# EAGLE board hacksaw_fp_r0 (EAGLE 7.3.0)
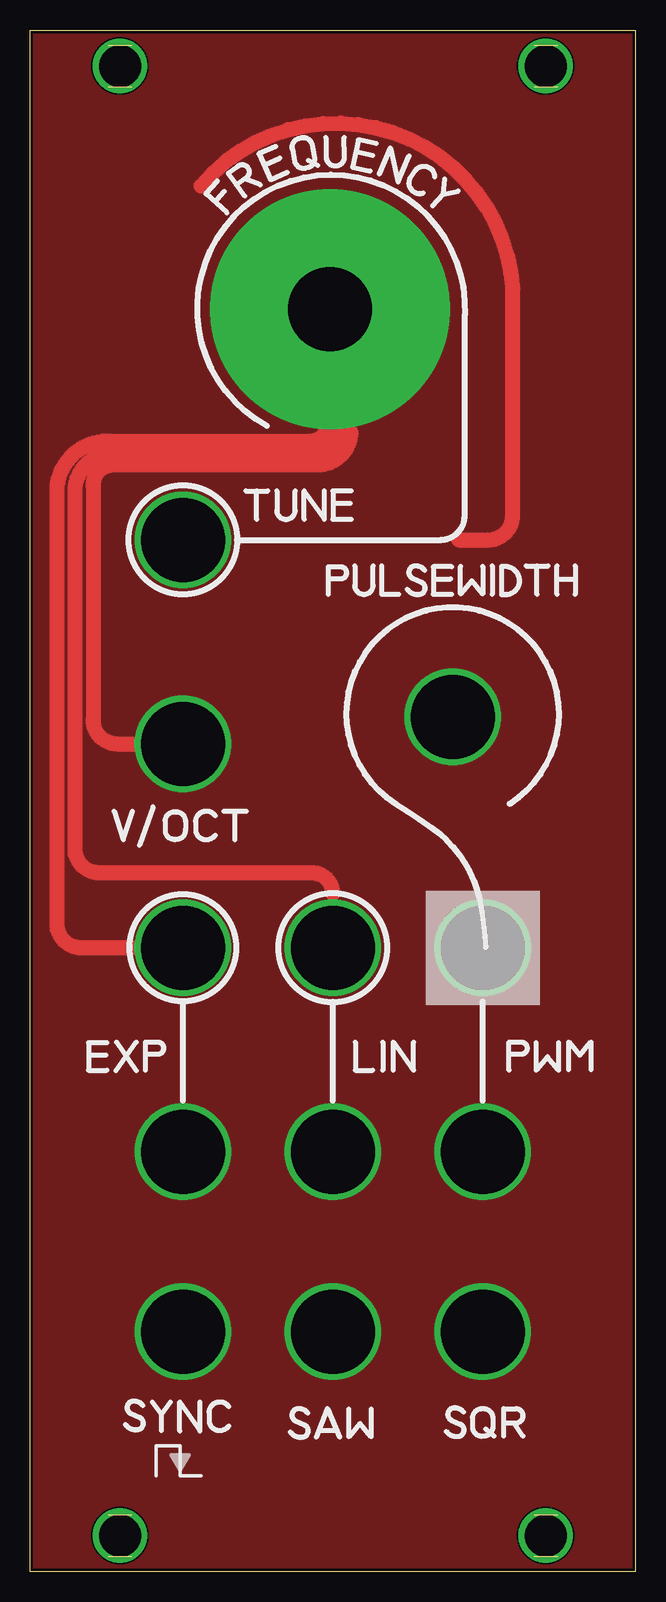
[diagram p0: board, top side]
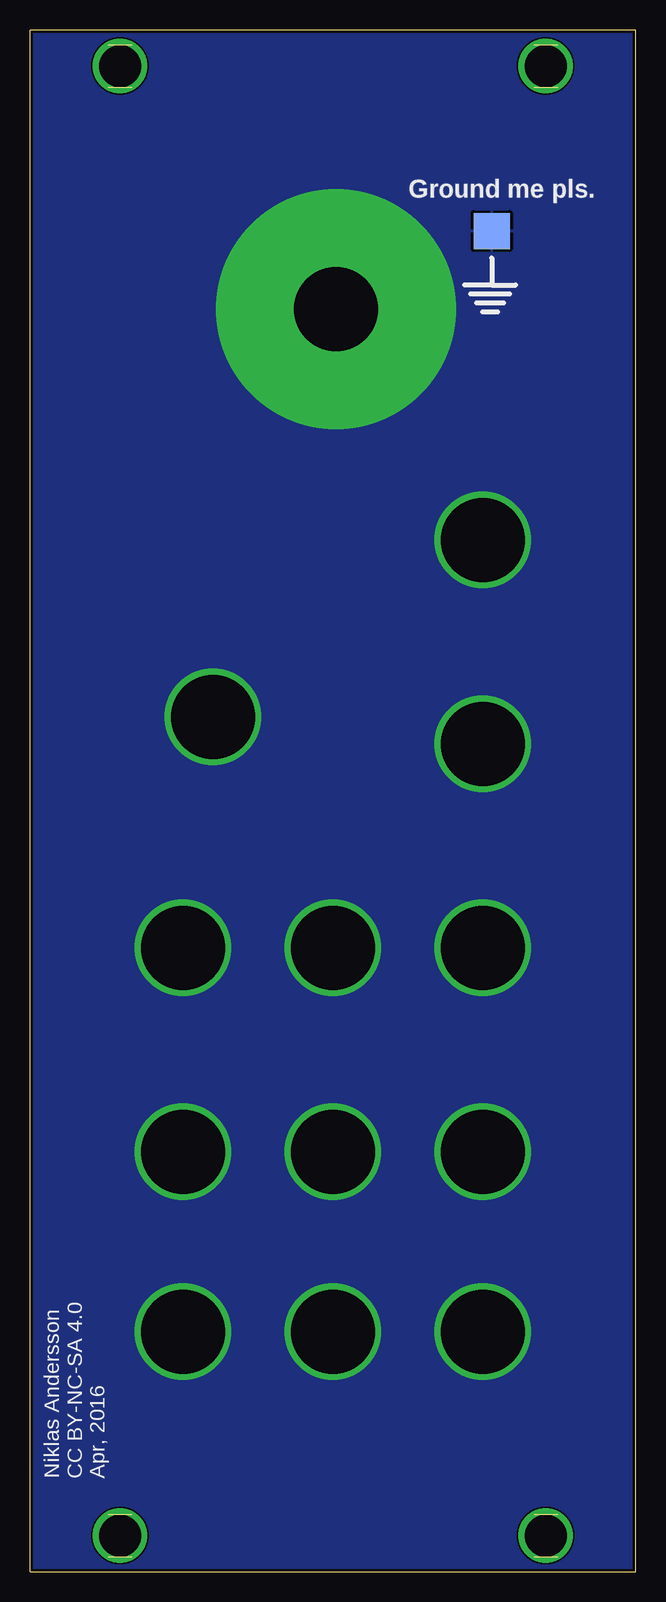
[diagram p1: board, bottom side, seen from below]

Size 50.5 x 128.5 mm. Coordinates in mm from the lower left corner, seen from the top.
Outline: 50.5,0 0,0 0,128.5 50.5,128.5 50.5,0
Copper layers (1*16): Top 0.035mm / dielectric 1.5mm / Bottom 0.035mm
Design rules "dirt_cheap_dirty_boards.v1 *": minimum track width 5mil, minimum drill 12mil, track to track 6mil, track to pad 6mil, pad to pad 6mil, via to via 6mil, smd to smd 0mil, copper to edge 10mil, drill to drill 10mil, minimum pad ring 10mil, minimum via ring 6mil, stop-mask expansion 2mil, vias tented up to drill 25mil, thermal gap 10mil
Milling: 8 lines

## Footprints (pad centres in the part's own frame; a part is rotated, then mirrored left to right if it is on the bottom)
FP_GND = smd 3 x 3 bottom: P$1 0,0

## Placement (x,y rotation side)
J16  TERMINAL_1SMT  [FP_GND]  12,111.75 0 top

## Library data of the parts
J16 = 000

## Nets
GND: J16.P$1

## Tracks (layer width: path | path; a pad name or v marks a point on that pad's centre or on a via)
GND  (via drill 7, 7 pad 20)
  Top 0.406: 26.75,95.5 26.75,95
  Top 1.25: 8.5,52 4.25,52 arc-90 2.25,54 2.25,90 arc-90 6.5,94.25 23.5,94.25 arc90 24.75,95.5 | 26.75,95 arc-90 24,92.25 7,92.25 arc90 5.25,90.5 5.25,71 arc90 7.25,69 9,69 | 25.25,56.5 arc90 23.5,58.25 5.75,58.25 arc-90 3.75,60.25 3.75,90 arc-90 7,93.25 23.75,93.25 arc90 25.75,95.25 | 35.75,86 38.25,86 arc90 40.25,88 40.25,106.75 arc137 14.25,115.5
  other vias: 12.75,20 25.25,20 37.75,20 12.75,35 25.25,35 37.75,35 12.75,69 12.75,52 25.25,52 37.75,52 25,105.25 35.25,71.25 12.75,86
  pour Top: 0,128.5 50.5,128.5 50.5,0 0,0
  pour Bottom: 0,128.5 50.5,128.5 50.5,0 0,0
S$1  (via drill 3.5)
  other vias: 7.5,125.5
S$2  (via drill 3.5)
  other vias: 43,125.5
S$3  (via drill 3.5)
  other vias: 7.5,3
S$4
  pour Top: 25,115.25 25.5,115.25 arc-90 35,105.5 35,105.25 arc-90 25,95.25 arc-90 15,105.25 arc-90
S$5  (via drill 3.5)
  other vias: 43,3

## Text on the board
bPlace: Ground me pls.
bNames: Niklas Andersson / CC BY-NC-SA 4.0 / Apr, 2016